# EAGLE board Esquematico (EAGLE 9.6.2)
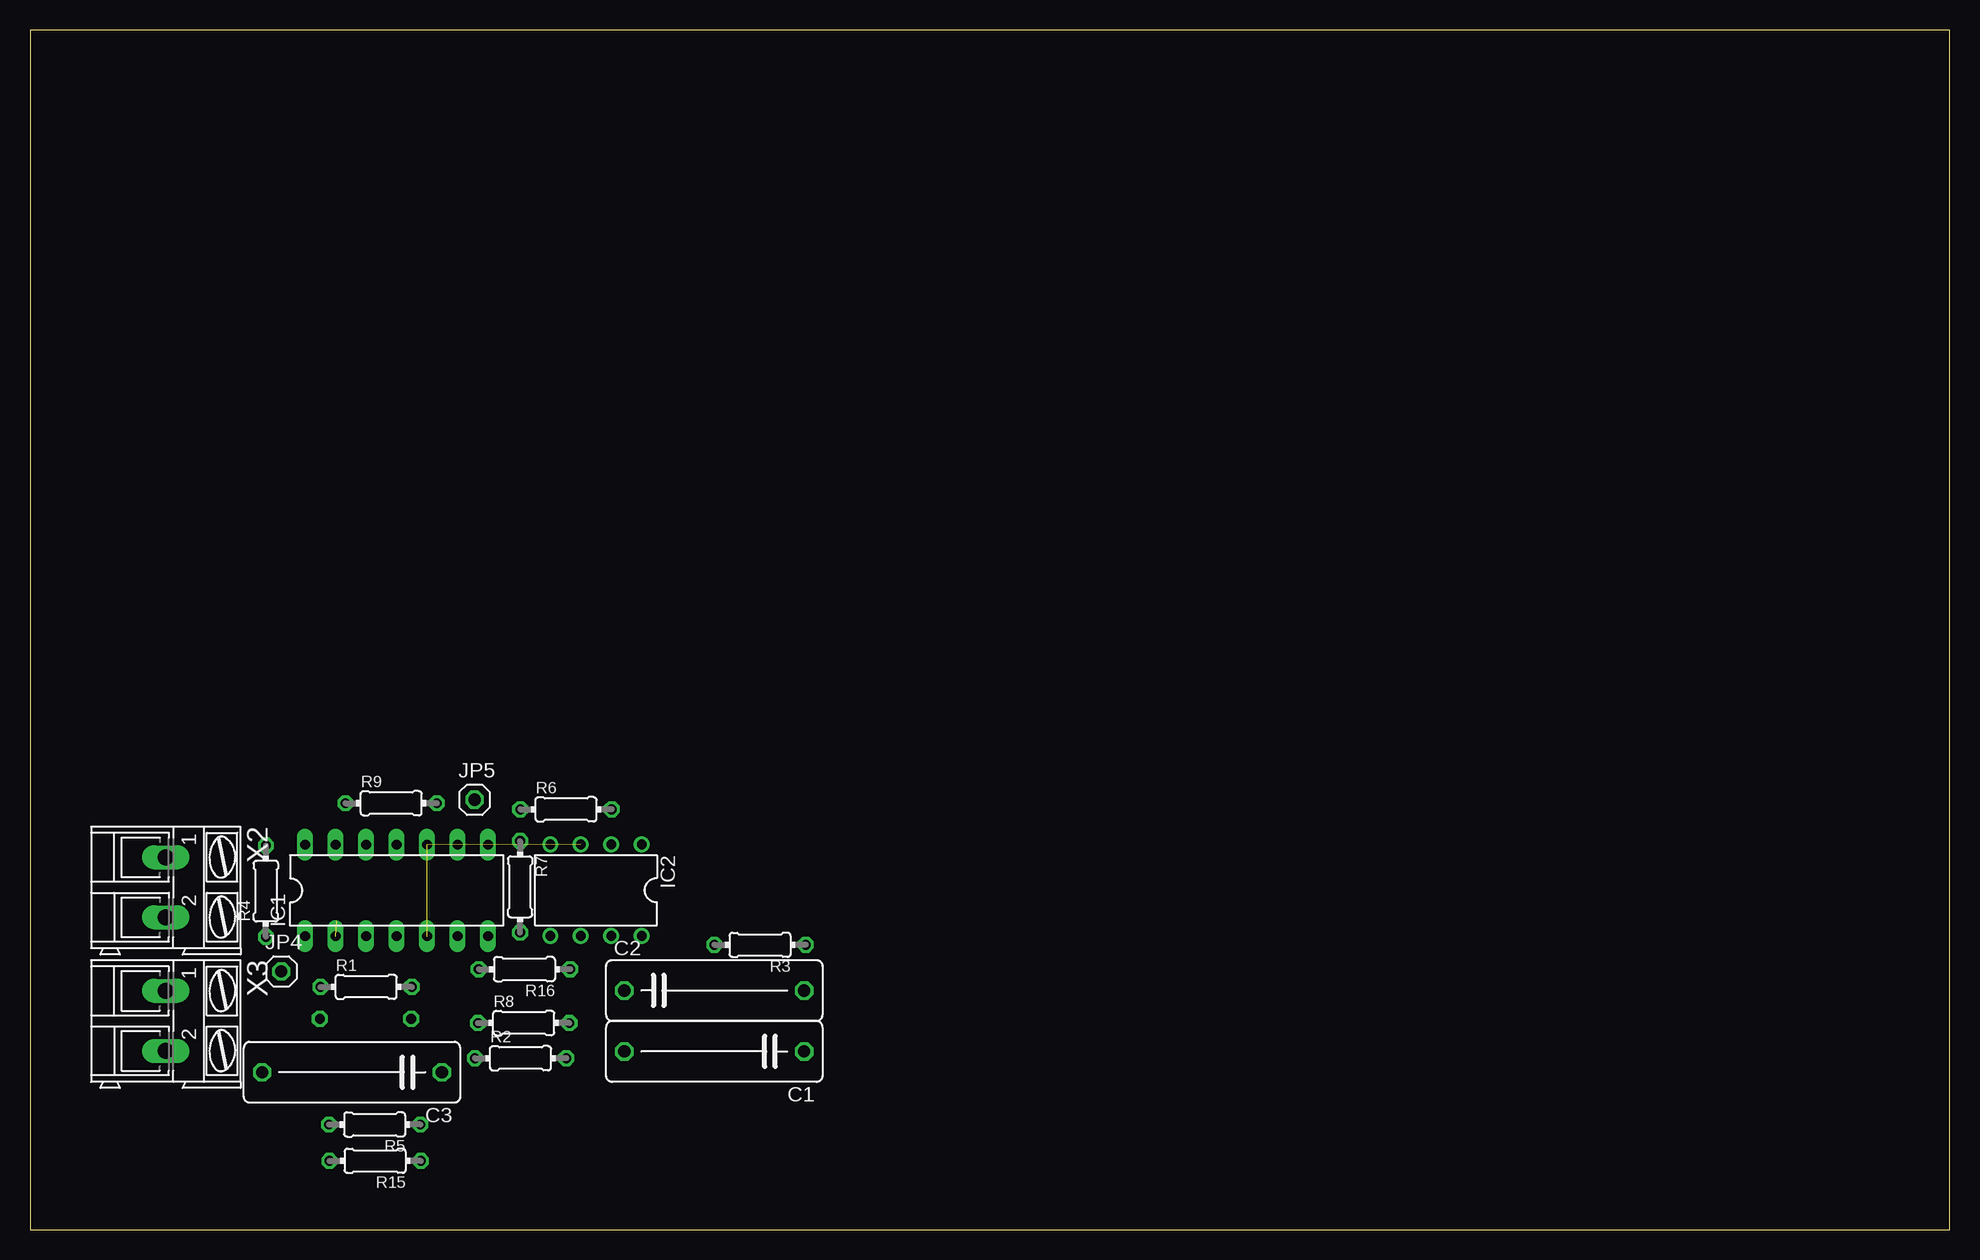
[diagram p0: board, top side]
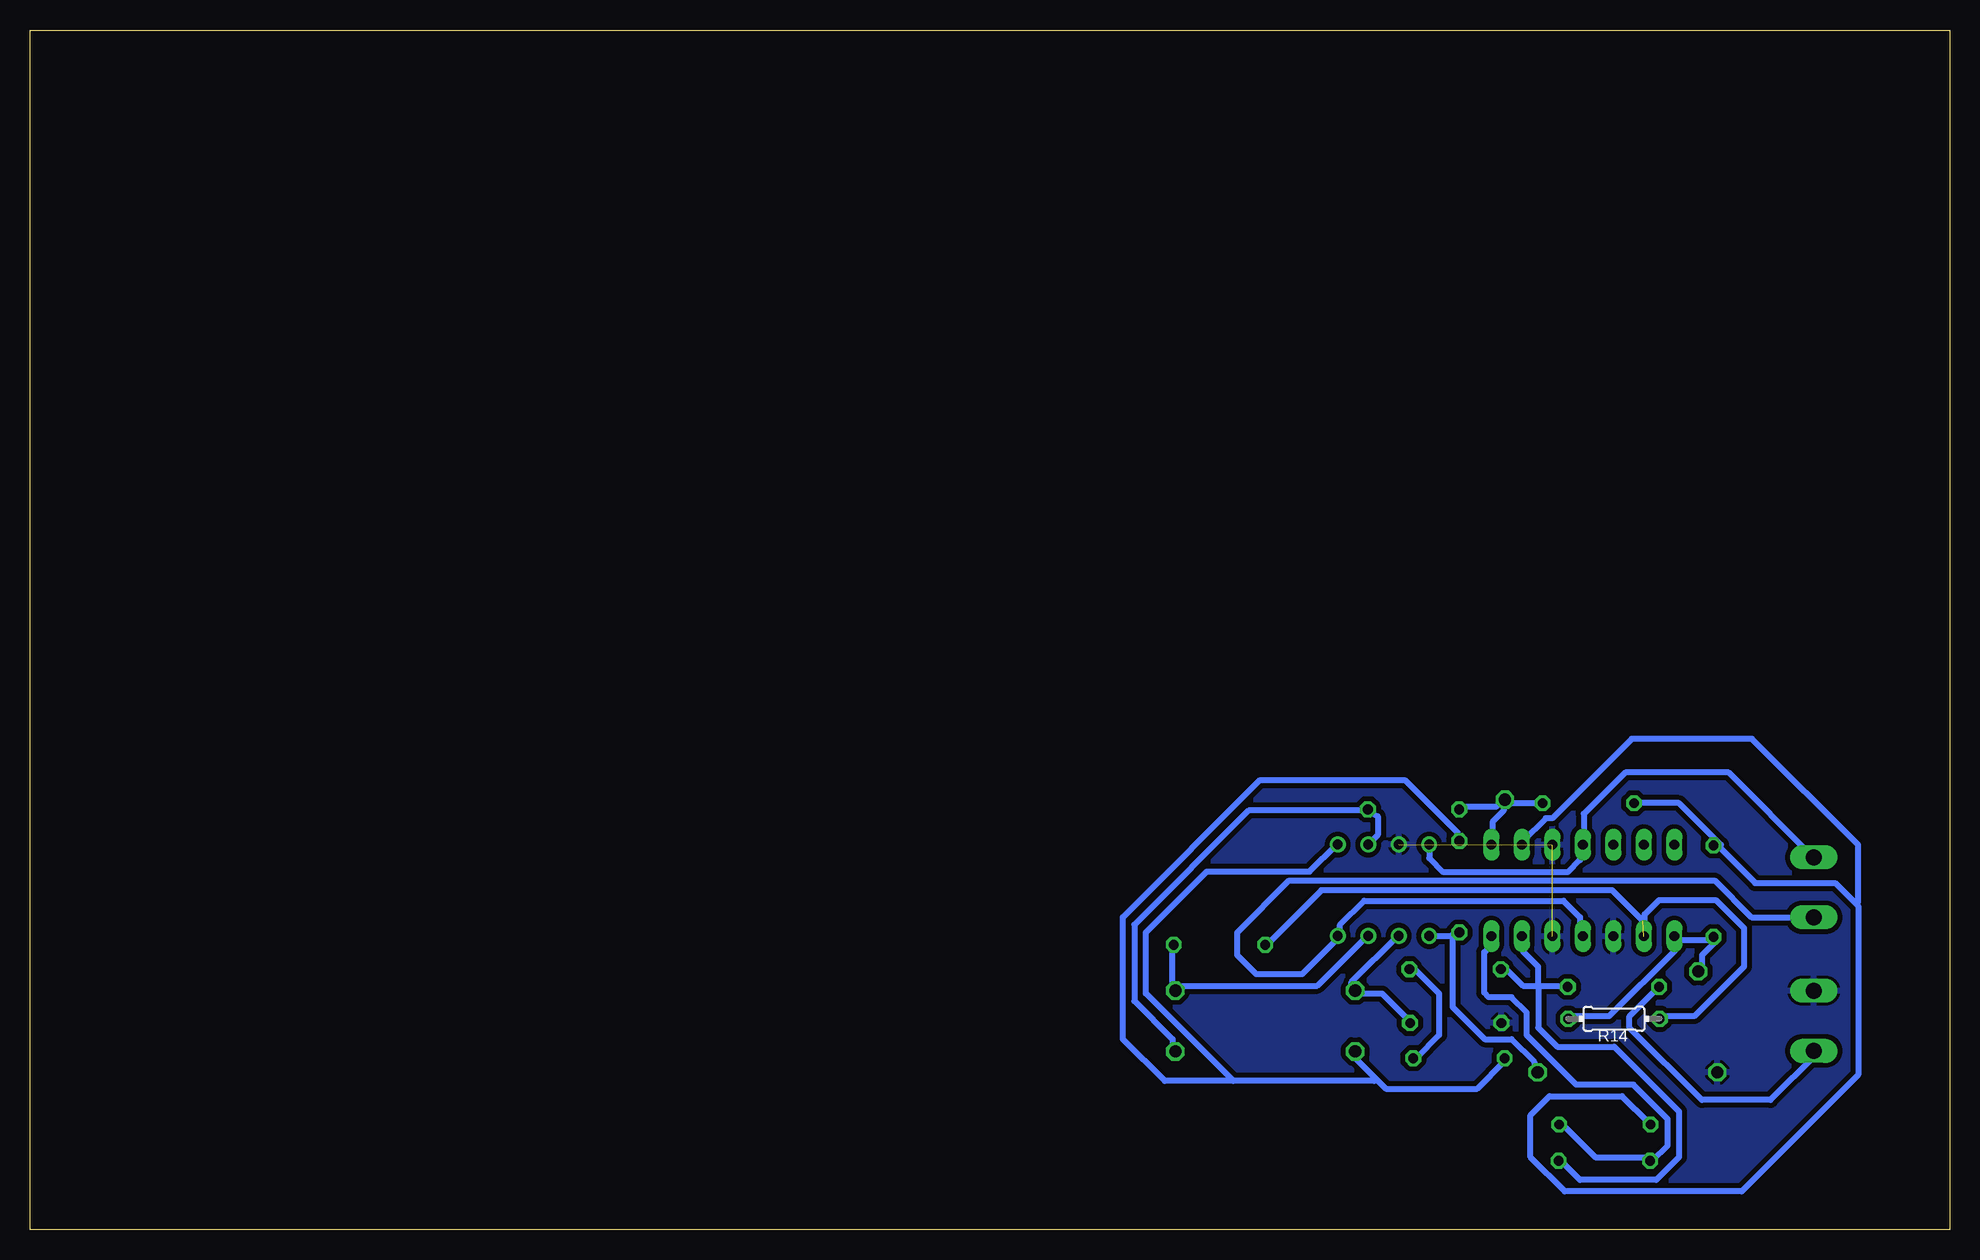
[diagram p1: board, bottom side, seen from below]

Size 160 x 100 mm. Coordinates in mm from the lower left corner, seen from the top.
Outline: 0,0 160,0 160,100 0,100 0,0
Copper layers (1*16): Top 0.035mm / dielectric 1.5mm / Bottom 0.035mm
Design rules "default *": minimum track width 20mil, minimum drill 0.35mm, track to track 16mil, track to pad 16mil, pad to pad 6mil, via to via 6mil, smd to smd 6mil, copper to edge 40mil, drill to drill 6mil, minimum pad ring 10mil, minimum via ring 8mil, stop-mask expansion 4mil, vias tented up to drill 0mil, thermal gap 10mil

## Footprints (pad centres in the part's own frame; a part is rotated, then mirrored left to right if it is on the bottom)
C150-054X183 = drill 1.016 octagon: 1 -7.493,0; 2 7.493,0
DIL14 = drill 0.813 long: 1 -7.62,-3.81; 2 -5.08,-3.81; 3 -2.54,-3.81; 4 0,-3.81; 5 2.54,-3.81; 6 5.08,-3.81; 7 7.62,-3.81; 8 7.62,3.81; 9 5.08,3.81; 10 2.54,3.81; 11 0,3.81; 12 -2.54,3.81; 13 -5.08,3.81; 14 -7.62,3.81
DIL08 = drill 0.813 pad 1.27: 1 -3.81,-3.81; 2 -1.27,-3.81; 3 1.27,-3.81; 4 3.81,-3.81; 5 3.81,3.81; 6 1.27,3.81; 7 -1.27,3.81; 8 -3.81,3.81
1X01 = drill 1.016 octagon: 1 0,0
0204/7 = drill 0.813 octagon: 1 -3.81,0; 2 3.81,0
AK300/2 = drill 1.321 long: 1 -2.515,0; 2 2.489,0

## Placement (x,y rotation side)
C1  [C150-054X183]  57.04,14.84 180 top
C2  [C150-054X183]  57.04,19.92 0 top
C3  [C150-054X183]  26.84,13.11 180 top
IC1  LM324N  [DIL14]  30.56,28.27 0 top
IC2  LF353N  [DIL08]  47.18,28.29 180 top
JP4  [1X01]  20.94,21.51 0 top
JP5  [1X01]  37.06,35.83 0 top
R1  [0204/7]  28.02,20.23 0 top
R2  [0204/7]  40.89,14.28 0 top
R3  33k  [0204/7]  60.85,23.73 180 top
R4  [0204/7]  19.66,28.21 90 top
R5  [0204/7]  28.73,8.75 180 top
R6  [0204/7]  44.68,35.03 0 top
R7  [0204/7]  40.85,28.58 270 top
R8  [0204/7]  41.16,17.22 0 top
R9  [0204/7]  30.11,35.54 0 top
R14  [0204/7]  27.97,17.56 180 bottom
R15  [0204/7]  28.77,5.72 180 top
R16  [0204/7]  41.21,21.7 180 top
X2  [AK300/2]  11.32,28.52 270 top
X3  [AK300/2]  11.32,17.38 270 top

## Library data of the parts
C1-C3 = rcl; SPICEPREFIX: C
IC1 IC2 = linear
JP4 JP5 = pinhead
R1-R9 R14-R16 = rcl; SPICEPREFIX: R
X2 X3 = con-ptr500; OC_FARNELL: unknown; OC_NEWARK: unknown

## Nets
-X1: C2.2 IC2.7 R3.1
-X2: C1.2 IC2.1 R2.1 R7.1
GND: C3.2 IC1.3 IC1.5 IC1.10 IC2.3 R8.1 X3.1
N$1: R2.2 R16.1
N$2: C1.1 IC2.2 R6.2
N$4: C2.1 IC2.6 R8.2
N$6: C3.1 IC2.5 R7.2
N$7: IC1.6 R1.2 R15.1 R16.2
N$10: IC1.2 R3.2 R14.1
N$13: IC1.7 R5.1 R15.2
N$14: IC1.9 R4.2 R5.2 R9.1
U: R1.1 X3.2
V+: IC1.4 IC2.8 X2.2
V-: IC1.11 IC2.4 X2.1
X2P: IC1.8 JP5.1 R6.1 R9.2
Y: IC1.1 JP4.1 R4.1 R14.2

## Tracks (layer width: path | path; a pad name or v marks a point on that pad's centre or on a via)
-X1
  Bottom 0.508: 64.77,20.32 64.77,20 C2.2 64.77,20.32 | 64.77,20.32 64.77,23.5 R3.1 | 64.77,20.32 52.7,20.32 48.58,24.45 IC2.7
-X2
  Bottom 0.508: 47.78,12.54 49.85,14.61 C1.2 | 47.78,12.54 46.99,11.75 39.37,11.75 37.15,13.97 R2.1 | 59.69,12.38 47.94,12.38 47.78,12.54 | 59.69,12.38 65.41,12.38 68.9,15.88 68.9,26.04 57.47,37.47 45.4,37.47 40.96,33.02 40.96,32.7 R7.1 | 59.69,12.38 66.99,19.68 66.99,24.77 61.91,29.84 53.34,29.84 51.12,32.07 IC2.1
GND  (2 unrouted)
  pour Bottom (isolate 0.406): 160,0 0,0 0,100 160,100
N$1
  Bottom 0.508: R2.2 44.45,14.29 42.55,16.19 42.55,19.68 44.77,21.91 R16.1
N$2
  Bottom 0.508: IC2.2 47.65,32.9 47.65,34.46 48.14,34.68 R6.2 48.58,34.92 58.42,34.92 67.94,25.4 67.94,19.05 64.77,15.88 64.77,14.92 C1.1
N$4
  Bottom 0.508: R8.2 45.09,17.46 47.31,19.68 49.53,19.68 C2.1 49.85,20 49.85,20.64 46.04,24.45 IC2.6
N$6
  Bottom 0.508: IC2.5 43.18,24.45 41.59,24.45 40.96,25.08 R7.2 41.42,24.2 41.42,18.56 38.73,15.88 36.51,15.88 34.61,13.97 34.61,13.34 C3.1
N$7
  Bottom 0.508: 34.29,20.32 35.56,20.32 37.15,21.91 R16.2 | 34.29,20.32 32.07,20.32 R1.2 | 34.29,20.32 34.29,16.83 32.7,15.24 27.94,15.24 22.54,9.84 22.54,6.03 24.45,4.13 30.8,4.13 32.38,5.71 R15.1 | 34.29,20.32 34.29,21.91 35.56,23.18 35.56,24.45 IC1.6
N$10  (1 unrouted)
  Bottom 0.508: R14.1 24.13,17.78 21.27,17.78 17.14,21.91 17.14,25.13 19.5,27.48 24.2,27.48 25.4,26.28 25.4,24.77 IC1.2 | 25.55,25.72 28.11,28.28 52.37,28.28 56.83,23.81 R3.2
N$13
  Bottom 0.508: R5.1 32.38,8.89 29.53,6.03 25.08,6.03 R15.2 24.77,5.71 23.5,6.99 23.5,9.21 26.35,12.06 31.11,12.06 35.24,16.19 35.24,18.1 36.51,19.37 38.42,19.37 38.79,19.74 38.79,23.12 38.42,23.5 38.42,24.45 IC1.7
N$14
  Bottom 0.508: 7.78,27.15 9.53,28.89 16.19,28.89 19.37,32.07 R4.2 19.05,32.07 22.54,35.56 26.31,35.56 R9.1 | 7.78,27.15 7.62,26.99 7.62,12.88 17.33,3.17 32.07,3.17 34.92,6.03 34.92,9.53 33.34,11.11 27.3,11.11 25.08,8.89 R5.2 | IC1.9 35.56,32.38 33.66,34.29 33.12,34.29 26.5,40.91 16.46,40.91 7.62,32.07 7.62,27.3 7.78,27.15
U
  Bottom 0.508: R1.1 24.45,20 26.67,17.78 26.67,16.83 20.64,10.79 14.92,10.79 11.11,14.61 X3.2
V+
  Bottom 0.508: IC1.4 30.8,24.77 30.8,26.04 32.18,27.41 48.79,27.41 50.8,25.4 50.8,24.77 IC2.8 50.8,24.45 53.98,21.27 57.78,21.27 59.37,22.86 59.37,24.77 55.04,29.09 19.57,29.09 16.51,26.04 11.43,26.04 X2.2
V-
  Bottom 0.508: X2.1 11.43,31.11 18.41,38.1 27.03,38.1 30.48,34.65 30.48,32.38 IC1.11 30.8,32.07 30.8,30.8 31.82,29.78 42.17,29.78 43.37,30.98 IC2.4
X2P
  Bottom 0.508: IC1.8 38.1,32.38 38.1,33.97 37.15,34.92 37.15,35.56 JP5.1 | R9.2 33.93,35.56 36.83,35.56 JP5.1 | R6.1 40.64,35.24 37.78,35.24 37.15,35.88 JP5.1
Y
  Bottom 0.508: R14.2 31.75,17.78 28.38,17.78 22.87,23.29 22.94,23.56 IC1.1 22.86,24.45 22.54,24.13 19.68,24.13 R4.1 19.37,24.13 20.64,22.86 20.64,21.59 JP4.1